# Altium PCB TxFM.PcbDoc
Units mm, origin at the board's own origin, x right, y up, seen from the top; angles counter-clockwise.
Board outline 37 x 31 mm, 2 copper layers (Top Layer, Bottom Layer); 21 components, 10 nets, 44 pads, 0 vias.
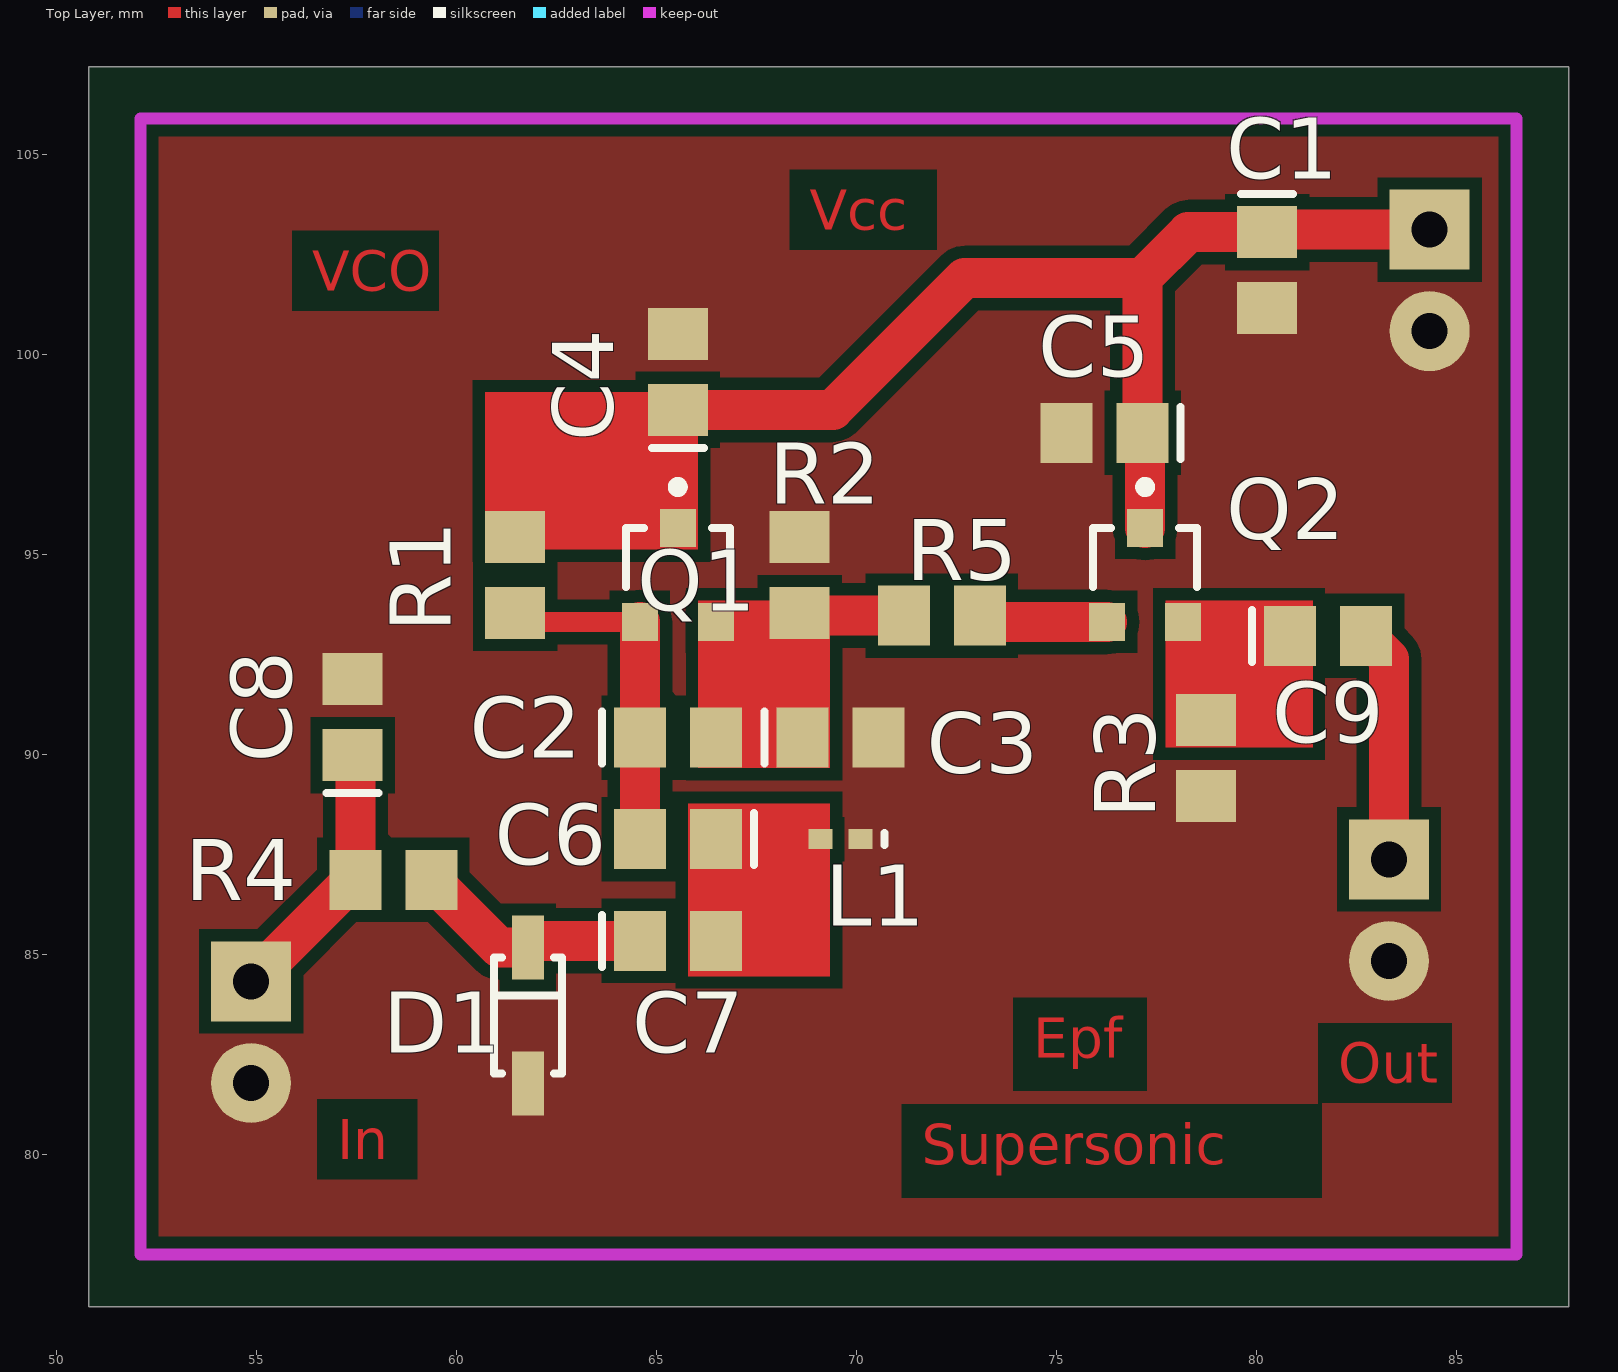
[diagram p0: Top Layer view]
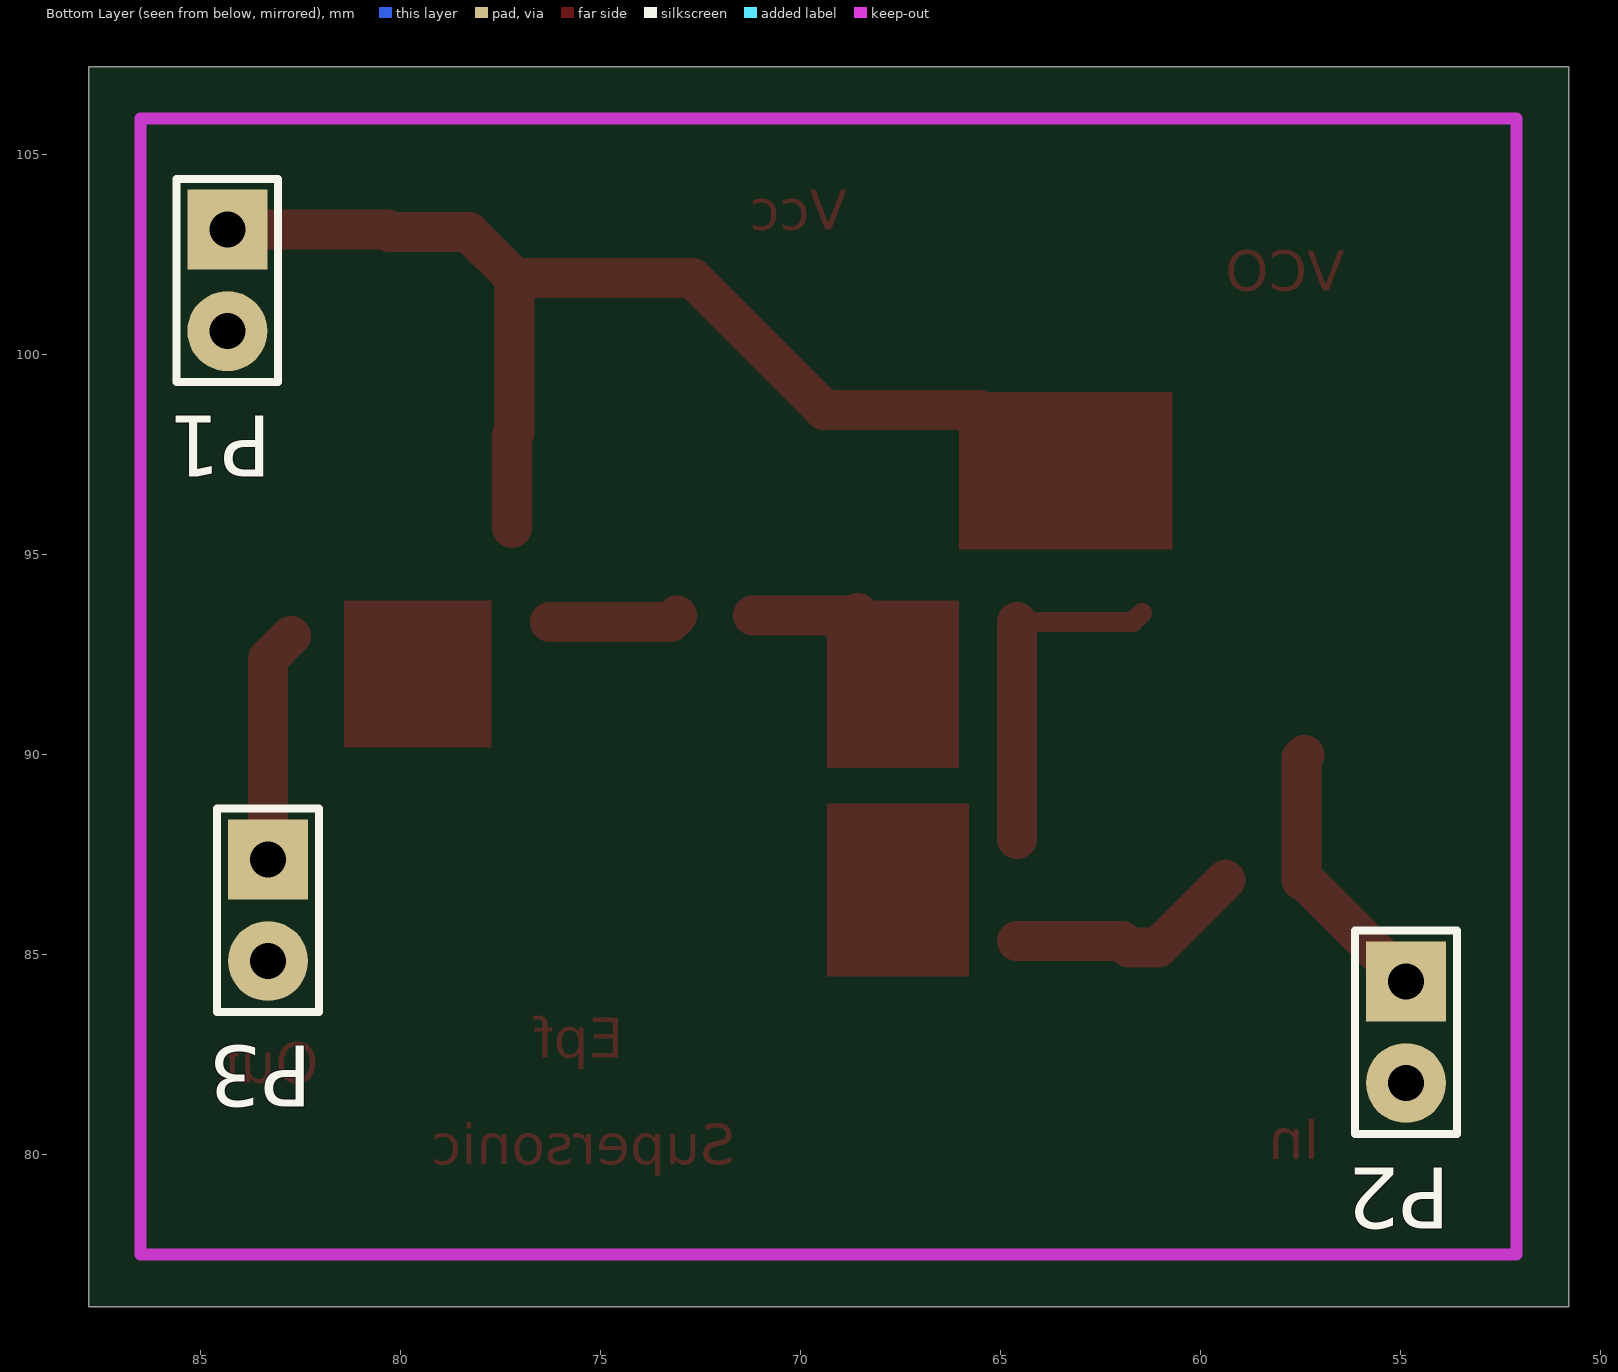
[diagram p1: Bottom Layer view, seen from below]

## Layer stack, top to bottom
Top Layer: signal copper 0.0356
Dielectric: dielectric 0.32, FR-4, Dk 4.8
Bottom Layer: signal copper 0.0356

## Board outline
50.8,76.2 87.8,76.2 87.8,107.2 50.8,107.2

## Design rules (kind name [scope] priority, off if disabled: settings)
Clearance [All] p1: gap=0.3
ComponentClearance [All] p1: gap=0.254 collisioncheckmode=3 verticalgap=0.254
PolygonConnect [All] p1: connectstyle=Direct reliefconductorwidth=0.254 reliefentries=4 polygonreliefangle="90 Angle"
RoomDefinition TxFM [InComponentClass('TxFM')] p1: confinementstyle=ConfineIn formatcopy=TRUE lockcomponents=FALSE outline 50.292,75.819 87.757,75.819 87.757,106.934 50.292,106.934
RoutingVias [All] p1: holewidth=0.8 width=2 viastyle="Through Hole" minholewidth=0.711 minwidth=1.27 maxholewidth=2 maxwidth=3
SolderMaskExpansion [All] p1: expansion=0.102
TestPointUsage [All] p1: valid=0 allowmultiple=FALSE
Testpoint [All] p1: side=15 testpointundercomponent=TRUE minsize=1.016 maxsize=2.54 preferedsize=1.524 minholesize=0 maxholesize=1.016 preferedholesize=0.813 testpointgrid=0.025 style=1023 order=0123456789
Width [All] p1: maxlimit=3 minlimit=0.2 preferedwidth=1
18 further rules are at their usual default settings.

## Components (designator, comment, footprint, x,y, rotation, side; value= is the part's Value field where it differs from the comment)
C1 "Cap Pol3" C0805 80.264,102.108 r270 top
C2 "Cap Pol3" C0805 65.532,90.424 r0 top
C3 "Cap Pol3" C0805 69.596,90.424 r0 top
C4 "Cap Pol3" C0805 65.532,99.568 r90 top
C5 "Cap Pol3" C0805 76.2,98.044 r180 top
C6 "Cap Pol3" C0805 65.532,87.884 r180 top
C7 "Cap Pol3" C0805 65.532,85.344 r0 top
C8 "Cap Pol3" C0805 57.404,90.932 r90 top
C9 "Cap Pol3" C0805 81.788,92.964 r0 top
D1 "D Schottky" SOD123 59.436,80.772 r90 top
L1 "Inductor" 0402-A 69.596,87.884 r180 top
P1 "Header 2" HDR1X2 84.328,103.124 r270 bottom
P2 "Header 2" HDR1X2 54.864,84.328 r270 bottom
P3 "Header 2" HDR1X2 83.312,87.376 r270 bottom
Q1 "BFS17" SOT23 65.532,94.488 r0 top
Q2 "BFS17" SOT23 77.216,94.488 r0 top
R1 "Res Semi" 2012[0805] 61.468,94.488 r90 top
R2 "Res Semi" 2012[0805] 68.58,94.488 r270 top
R3 "Res Semi" 2012[0805] 78.74,89.916 r90 top
R4 "Res Semi" 2012[0805] 58.42,86.868 r180 top
R5 "Res Semi" 2012[0805] 72.136,93.472 r180 top

## Footprints (in the part's own frame and the unit in brackets; to place one, negate y for a bottom-side part, rotate by r counter-clockwise, add the part's x,y. Pads: shape width x height; smd on the part's side, far side on the other; paste and mask are expansions set on the pad)
0402-A [mm] "Chip Inductor; Body 1 x 0.5 mm (LxW typ)"
  rect 0.6x0.5 smd: 1(-0.5,0) 2(0.5,0)
  silkscreen extent -1.1,-0.15 -1.1,0.15
2012[0805] [mm] "Chip Resistor; Body 2.0 x 1.3 mm (LxW typ)"
  rect 1.3x1.5 smd: 1(-0.95,0) 2(0.95,0)
C0805 [mm] "Chip Capacitor; Body 2.0 x 1.2 mm (LxW typ)"
  rect 1.3x1.5 smd: 1(-0.95,0) 2(0.95,0)
  silkscreen extent -1.9,-0.65 -1.9,0.65
HDR1X2 [mm] "Connector; Header; 2 Position"
  rect 2x2 hole 0.9: 1(0,0)
  round 2 hole 0.9: 2(2.54,0)
  silkscreen extent -1.27,-1.27 3.81,1.27
SOD123 [mm]
  rect 1.6x0.8 smd: 1(1,-2.35) 2(4.4,-2.35)
  silkscreen extent 1.25,-3.2 4.15,-1.5
SOT23 [mm] "SOT-23; 3 Leads; Body 3.0 x 2.5 mm, inc. leads (LxW max)"
  rect 0.9x0.95 smd: 1(-0.95,-1.175) 2(0.95,-1.175) 3(0,1.175)
  silkscreen extent -1.3,-0.3 1.3,2.32

## Part data
C1 C2 C3 C4 C5 C6 C7 C8 C9: "Polarized Capacitor (Surface Mount)"
D1: "Schottky Diode"
P1 P2 P3: "Header, 2-Pin"
Q1 Q2: "NPN 1 GHz Wideband Transistor"
R1 R2 R3 R4 R5: "Semiconductor Resistor"

## Nets (pads, with @x,y where several pads share a name; then routed paths per layer and width w, separated by ;. In a path a pad name is that pad's centre, name@x,y a point inside that pad or via, vN(x,y) a via of type N, cw(c..) or ccw(c..) an arc to the next point about the centre after c; other vN are vias at no path point)
B1: C2.1 C6.2 Q1.1 R1.1 | length 8.6
  Top Layer w0.5: R1.1 61.693,93.313 Q1.1
  Top Layer w1: C6.2 C2.1 Q1.1
B2: Q2.1 R5.1 | length 3.2
  Top Layer w1: R5.1 73.245,93.313 Q2.1
E1: C2.2 C3.1 Q1.2 R2.2 R5.2 | length 2.6
  Top Layer w1: R2.2 68.646,93.472 R5.2
E2: C9.1 Q2.2 R3.2
GND: C1.2 C3.2 C4.2 C5.2 C8.2 D1.1 L1.1 P1.2 P2.2 P3.2 R2.1 R3.1
NetC6_1: C6.1 C7.2 L1.2
NetC7_1: C7.1 D1.2 R4.1 | length 6
  Top Layer w1: R4.1 61.066,85.172 D1.2 61.958,85.344 C7.1
NetC8_1: C8.1 P2.1 R4.2 | length 6.8
  Top Layer w1: P2.1 57.404,86.868 R4.2 57.47,89.916 C8.1
NetC9_2: C9.2 P3.1 | length 5.8
  Top Layer w1: C9.2 83.312,92.39 P3.1
VCC: C1.1 C4.1 C5.1 P1.1 Q1.3 Q2.3 R1.2 | length 26.9
  Top Layer w1: C4.1 69.408,98.618 72.705,101.915 77.15,101.915 ; Q2.3 77.216,97.978 C5.1 77.15,101.915 ; P1.1 80.33,103.124 C1.1 78.293,103.058 77.15,101.915

## Polygon pours and split planes (outlines as drawn)
GND on Top Layer (solid, remove dead copper): 51.181,106.68 51.181,76.835 87.376,76.835 87.376,106.553

## Keep-outs
Keep-Out Layer:
  lines w0.3: 52.1,77.5 52.1,105.9 86.5,105.9 86.5,77.5 52.1,77.5

## Other copper
Top Layer:
  rectangle net E2: 77.724,90.17 81.407,93.853
  rectangle net E1: 66.04,89.662 69.342,93.853
  rectangle net VCC: 60.706,95.123 66.04,99.06
  rectangle net NetC6_1: 65.786,84.455 69.342,88.773
  text "Vcc" at 68.834,103.124 h1
  text "VCO" at 56.388,101.6 h1
  text "Epf" at 74.422,82.423 h1
  text "Out" at 82.042,81.788 h1
  text "In" at 57.023,79.883 h1
  text "Supersonic" at 71.628,79.756 h1

## Silkscreen, mask and mechanical layers (free items; w line width, h text height)
Drill Drawing:
  text ".LEGEND" at 92.88,81.28 h1.52
  text "Drill Drawing." at 92.88,78.74 h1.52

## Dimensions
52.1,77.5 to 52.1,105.9 on Mechanical 1
52.1,77.5 to 86.5,77.5 on Mechanical 1